# EAGLE board main (EAGLE 8.7.0)
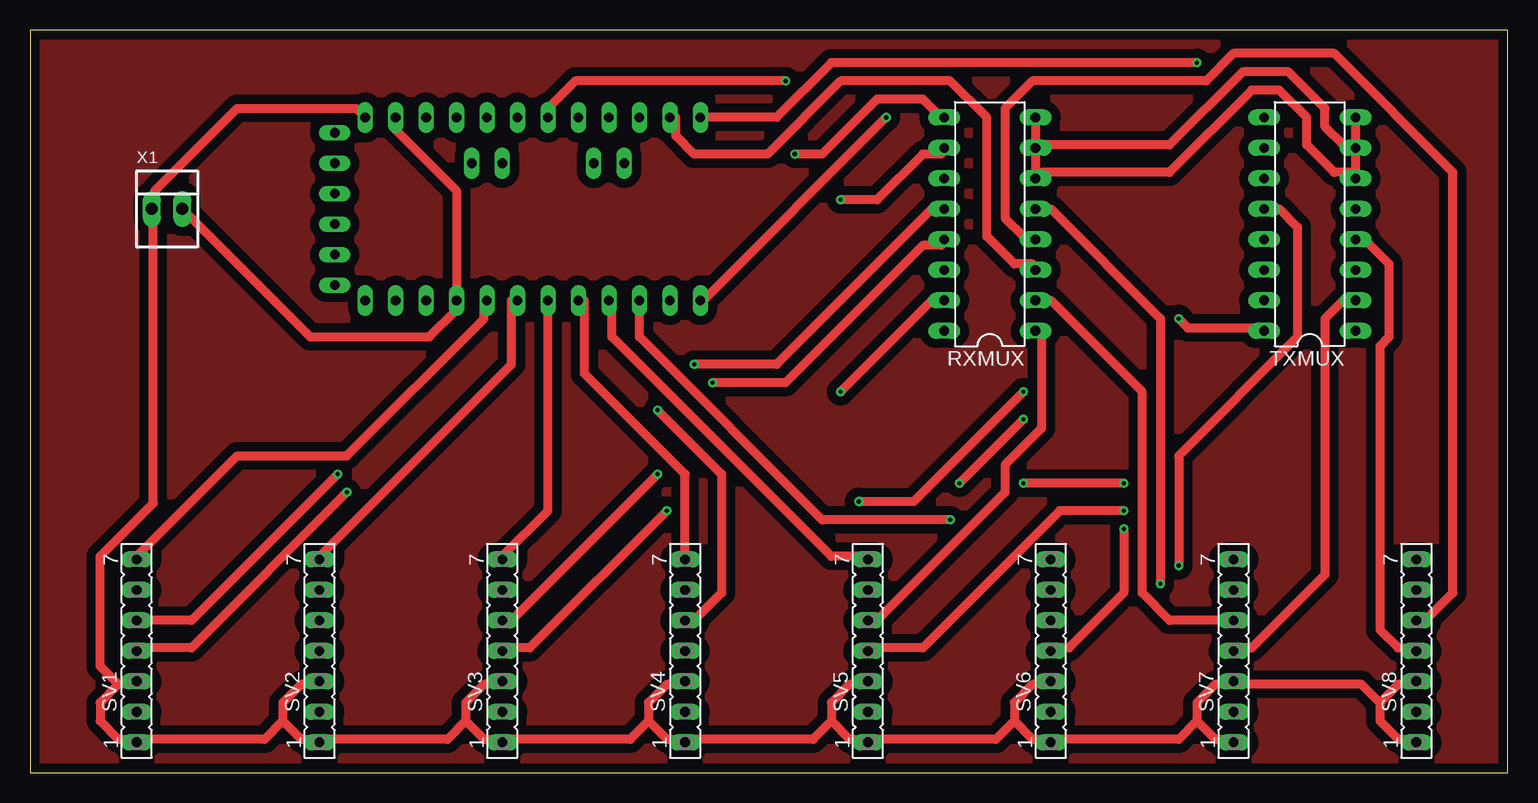
[diagram p0: board, top side]
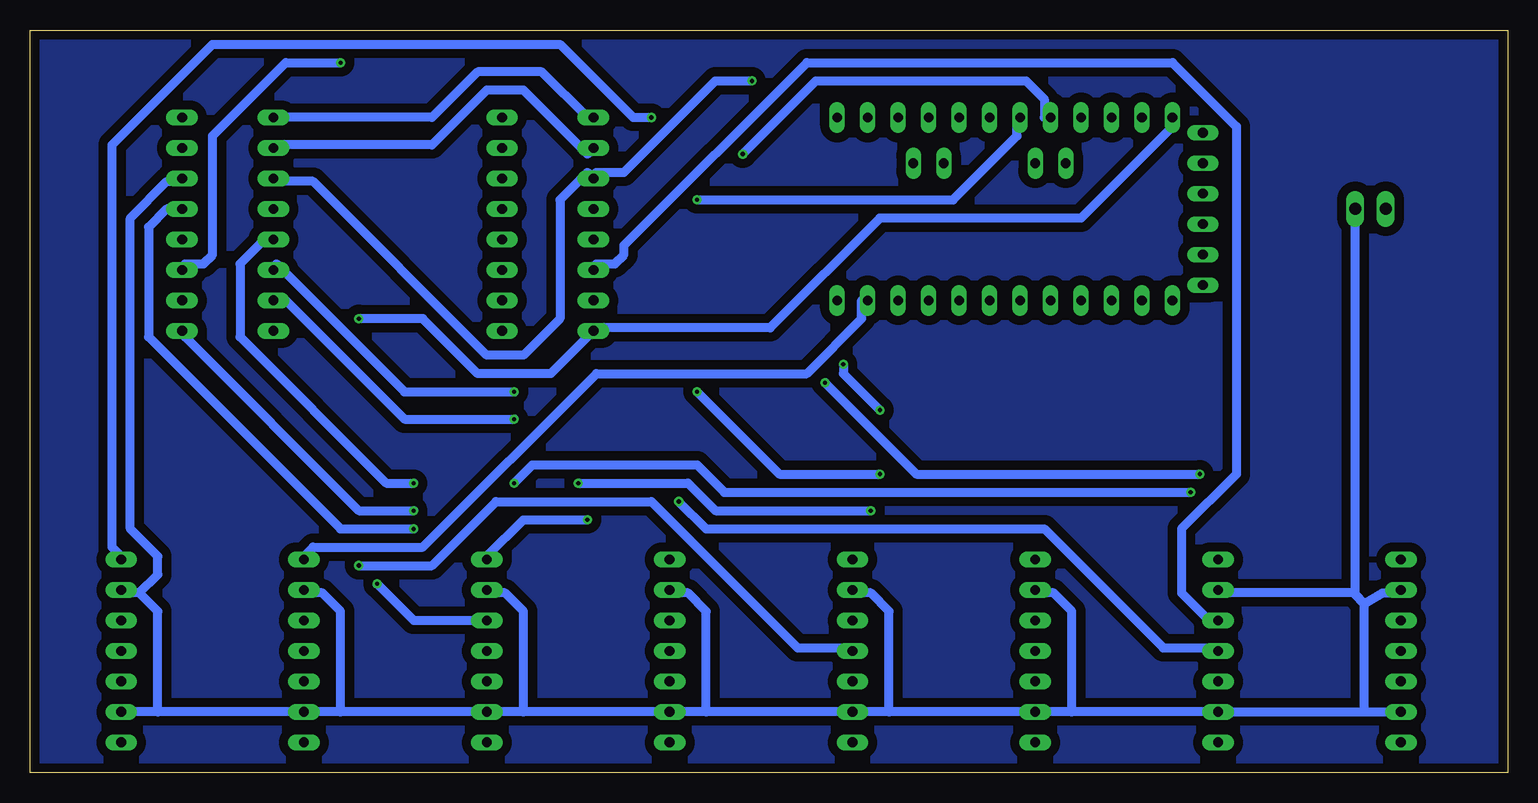
[diagram p1: board, bottom side, seen from below]

Size 123.17 x 61.9 mm. Coordinates in mm from the lower left corner, seen from the top.
Outline: 0,0 123.17,0 123.17,61.9 0,61.9 0,0
Copper layers (1*16): Top 0.035mm / dielectric 1.5mm / Bottom 0.035mm
Design rules "default *": minimum track width 30mil, minimum drill 0.35mm, track to track 30mil, track to pad 30mil, pad to pad 30mil, via to via 30mil, smd to smd 30mil, copper to edge 30mil, drill to drill 40mil, minimum pad ring 10mil, minimum via ring 8mil, stop-mask expansion 4mil, vias tented up to drill 0mil, thermal gap 10mil

## Footprints (pad centres in the part's own frame; a part is rotated, then mirrored left to right if it is on the bottom)
DIL16 = drill 0.813 long: 1 -8.89,-3.81; 2 -6.35,-3.81; 3 -3.81,-3.81; 4 -1.27,-3.81; 5 1.27,-3.81; 6 3.81,-3.81; 7 6.35,-3.81; 8 8.89,-3.81; 9 8.89,3.81; 10 6.35,3.81; 11 3.81,3.81; 12 1.27,3.81; 13 -1.27,3.81; 14 -3.81,3.81; 15 -6.35,3.81; 16 -8.89,3.81
FE07 = drill 0.813 long: 1 -7.62,0; 2 -5.08,0; 3 -2.54,0; 4 0,0; 5 2.54,0; 6 5.08,0; 7 7.62,0
PRO-MINI-2 = drill 0.8 long: A0 6.35,2.54; A1 6.35,0; A2 6.35,-2.54; A3 6.35,-5.08; A4 2.54,1.27; A5 2.54,3.81; A6 2.54,-8.89; A7 2.54,-6.35; D2 -8.89,2.54; D3 -8.89,0; D4 -8.89,-2.54; D5 -8.89,-5.08; D6 -8.89,-7.62; D7 -8.89,-10.16; D8 -8.89,-12.7; D9 -8.89,-15.24; D10 6.35,-15.24; D11 6.35,-12.7; D12 6.35,-10.16; D13 6.35,-7.62; DTR 5.08,15.24; GND 6.35,10.16; GND1 -8.89,5.08; GND2 -7.62,15.24; GND3 -5.08,15.24; RAW 6.35,12.7; RST 6.35,7.62; RST1 -8.89,7.62; RX1 -8.89,10.16; RX1-1 0,15.24; TX0 -8.89,12.7; TX0-1 2.54,15.24; VCC 6.35,5.08; VCC1 -2.54,15.24
22-23-2021 = drill 1 long: 1 -1.27,0; 2 1.27,0

## Placement (x,y rotation side)
RXMUX  4051N  [DIL16]  80.01,45.72 90 top
SV1  [FE07]  8.89,10.16 90 top
SV2  [FE07]  24.13,10.16 90 top
SV3  [FE07]  39.37,10.16 90 top
SV4  [FE07]  54.61,10.16 90 top
SV5  [FE07]  69.85,10.16 90 top
SV6  [FE07]  85.09,10.16 90 top
SV7  [FE07]  100.33,10.16 90 top
SV8  [FE07]  115.57,10.16 90 top
TXMUX  4051N  [DIL16]  106.68,45.72 90 top
U$1  PRO-MINI-2  [PRO-MINI-2]  40.64,48.26 90 top
X1  22-23-2021  [22-23-2021]  11.43,46.99 0 top

## Library data of the parts
RXMUX TXMUX = 40xx
SV1-SV8 = con-lsta; OC_FARNELL: unknown; OC_NEWARK: unknown
U$1 = Arduino-clone
X1 = con-molex; MF: MOLEX; MPN: 22-23-2021; OC_FARNELL: 1462926; OC_NEWARK: 25C3832; SPICEPREFIX: X

## Nets
ADDR0: RXMUX.11 TXMUX.11 U$1.A2
ADDR1: RXMUX.10 TXMUX.10 U$1.A1
ADDR2: RXMUX.9 TXMUX.9 U$1.A0
ENABLE0: SV1.7 U$1.D2
ENABLE1: SV2.7 U$1.D3
ENABLE2: SV3.7 U$1.D4
ENABLE3: SV4.7 U$1.D5
ENABLE4: SV5.7 U$1.D6
ENABLE5: SV6.7 U$1.D7
ENABLE6: SV7.7 U$1.D8
ENABLE7: SV8.7 U$1.D9
GND: RXMUX.6 RXMUX.8 SV1.2 SV1.6 SV2.2 SV2.6 SV3.2 SV3.6 SV4.2 SV4.6 SV5.2 SV5.6 SV6.2 SV6.6 SV7.2 SV7.6 SV8.2 SV8.6 TXMUX.6 TXMUX.8 U$1.GND U$1.GND1 X1.2
N$1: RXMUX.3 U$1.D11
N$2: TXMUX.3 U$1.D10
RX0: RXMUX.13 SV1.5
RX1: RXMUX.14 SV2.5
RX2: RXMUX.15 SV3.5
RX3: RXMUX.12 SV4.5
RX4: RXMUX.1 SV5.5
RX5: RXMUX.5 SV6.5
RX6: RXMUX.2 SV7.5
RX7: RXMUX.4 SV8.5
TX0: SV1.4 TXMUX.13
TX1: SV2.4 TXMUX.14
TX2: SV3.4 TXMUX.15
TX3: SV4.4 TXMUX.12
TX4: SV5.4 TXMUX.1
TX5: SV6.4 TXMUX.5
TX6: SV7.4 TXMUX.2
TX7: SV8.4 TXMUX.4
VCC: RXMUX.16 SV1.1 SV1.3 SV2.1 SV2.3 SV3.1 SV3.3 SV4.1 SV4.3 SV5.1 SV5.3 SV6.1 SV6.3 SV7.1 SV7.3 SV8.1 SV8.3 TXMUX.16 U$1.RAW X1.1
VEE: RXMUX.7 TXMUX.7

## Tracks (layer width: path | path; a pad name or v marks a point on that pad's centre or on a via)
ADDR0  (via drill 0.35)
  Top 0.762: U$1.A2 43.18,55.37 45.47,57.66 v62.99,57.66
  Bottom 0.762: v62.99,57.66 66.04,57.66 73.66,50.04 75.95,50.04 RXMUX.11 76.71,50.04 78.99,47.75 78.99,37.85 82.04,34.8 85.09,34.8 99.57,49.28 102.62,49.28 TXMUX.11
ADDR1  (via drill 0.35)
  Top 0.762: v67.56,47.75 70.61,47.75 74.42,51.56 75.95,51.56 RXMUX.10
  Bottom 0.762: v67.56,47.75 46.23,47.75 40.89,53.09 40.89,54.61 U$1.A1 | TXMUX.10 102.62,52.32 89.66,52.32 85.09,56.9 82.04,56.9 76.71,51.56 RXMUX.10
ADDR2  (via drill 0.35)
  Top 0.762: v63.75,51.56 66.04,51.56 70.61,56.13 74.42,56.13 75.95,54.61 RXMUX.9
  Bottom 0.762: v63.75,51.56 57.66,57.66 40.13,57.66 38.61,56.13 38.61,54.61 U$1.A0 | TXMUX.9 89.66,54.61 85.85,58.42 80.52,58.42 76.71,54.61 RXMUX.9
ENABLE0
  Top 0.762: U$1.D2 37.85,39.37 37.85,37.85 26.42,26.42 17.27,26.42 8.89,18.03 SV1.7
ENABLE1
  Top 0.762: U$1.D3 40.13,39.37 40.13,34.04 24.13,18.03 SV2.7
ENABLE2
  Top 0.762: U$1.D4 43.18,21.84 39.37,18.03 SV3.7
ENABLE3
  Top 0.762: SV4.7 54.61,24.89 46.23,33.27 46.23,39.37 U$1.D5
ENABLE4
  Top 0.762: U$1.D6 48.51,39.37 48.51,36.32 66.8,18.03 69.85,18.03 SV5.7
ENABLE5  (via drill 0.35)
  Top 0.762: U$1.D7 50.8,36.32 66.04,21.08 v76.71,21.08
  Bottom 0.762: v76.71,21.08 82.04,21.08 85.09,18.03 SV6.7
ENABLE6
  Bottom 0.762: U$1.D8 53.85,39.37 53.85,37.85 58.42,33.27 75.95,33.27 90.42,18.8 99.57,18.8 100.33,18.03 SV7.7
ENABLE7  (via drill 0.35)
  Top 0.762: v71.37,54.61 56.13,39.37 U$1.D9
  Bottom 0.762: v71.37,54.61 72.9,54.61 78.99,60.71 107.95,60.71 116.33,52.32 116.33,18.8 115.57,18.03 SV8.7
GND
  Top 0.762: U$1.GND 30.35,54.61 30.35,53.72 35.56,48.51 U$1.GND1 35.56,38.61 33.27,36.32 23.37,36.32 X1.2 | TXMUX.8 TXMUX.6 110.24,50.04 108.71,50.04 106.43,52.32 106.43,54.61 104.14,56.9 101.85,56.9 95,50.04 84.33,50.04 RXMUX.6 RXMUX.8
  Bottom 0.762: 11.94,5.08 SV2.2 36.32,5.08 | 11.94,5.08 SV1.2 | 36.32,5.08 SV3.2 51.56,5.08 | 51.56,5.08 SV4.2 66.8,5.08 | 66.8,5.08 SV5.2 82.04,5.08 | 82.04,5.08 SV6.2 97.28,5.08 | 11.94,14.1 10.41,14.99 8.89,14.99 SV1.6 | 11.94,5.08 11.94,14.1 | 11.94,14.1 12.7,14.86 | 12.7,14.86 12.83,14.99 24.13,14.99 SV2.6 | 36.32,5.08 36.32,13.46 37.85,14.99 39.37,14.99 SV3.6 | 51.56,5.08 51.56,13.46 53.09,14.99 54.61,14.99 SV4.6 | 66.8,5.08 66.8,13.46 68.33,14.99 69.85,14.99 SV5.6 | 82.04,5.08 82.04,13.46 83.57,14.99 85.09,14.99 SV6.6 | 97.28,5.08 SV7.2 112.52,5.08 | 97.28,5.08 97.28,13.46 98.81,14.99 100.33,14.99 SV7.6 | 112.52,5.08 SV8.2 | 114.05,14.99 115.57,14.99 SV8.6 | 114.05,14.99 112.52,13.46 112.52,5.08 | 12.7,14.86 X1.2 | 114.05,14.99 112.52,16.51 112.52,18.03 114.81,20.32 114.81,46.23 111.76,49.28 111,49.28 TXMUX.6
N$1
  Top 0.762: U$1.D11 53.85,54.61 53.85,53.09 55.37,51.56 61.47,51.56 67.56,57.66 76.71,57.66 79.76,54.61 79.76,44.7 82.04,42.42 83.57,42.42 RXMUX.3
N$2  (via drill 0.35)
  Top 0.762: U$1.D10 62.23,54.61 66.8,59.18 v97.28,59.18
  Bottom 0.762: v97.28,59.18 101.85,59.18 107.95,53.09 107.95,43.18 108.71,42.42 110.24,42.42 TXMUX.3
N$3
  pour Top: 0.63,61.6 123.19,61.6 123.19,0 0.63,0 0,0 0,61.6
  pour Bottom: 0.63,61.6 123.19,61.6 123.19,0 0.63,0 0,0 0,61.6
RX0  (via drill 0.35)
  Top 0.762: SV1.5 13.46,12.7 v25.65,24.89 | v56.9,32.51 62.99,32.51 74.42,43.94 75.95,43.94 RXMUX.13
  Bottom 0.762: v25.65,24.89 49.28,24.89 v56.9,32.51
RX1
  Bottom 0.762: SV2.5 24.89,12.7 27.18,14.99 27.18,20.32 22.61,24.89 22.61,53.85 27.94,59.18 58.42,59.18 73.66,43.94 73.66,43.18 74.42,42.42 75.95,42.42 RXMUX.14
RX2  (via drill 0.35)
  Top 0.762: SV3.5 40.13,12.7 v52.32,24.89 | v67.56,31.75 75.18,39.37 RXMUX.15
  Bottom 0.762: v52.32,24.89 60.71,24.89 v67.56,31.75
RX3  (via drill 0.35)
  Top 0.762: SV4.5 55.37,12.7 57.66,14.99 57.66,24.89 v52.32,30.23 | v55.37,34.04 62.23,34.04 75.18,46.99 RXMUX.12
  Bottom 0.762: v52.32,30.23 55.37,33.27 v55.37,34.04
RX4
  Top 0.762: SV5.5 70.61,12.7 81.28,23.37 81.28,25.65 84.33,28.7 84.33,36.32 RXMUX.1
RX5  (via drill 0.35)
  Top 0.762: v94.23,15.75 94.23,37.85 85.09,46.99 RXMUX.5
  Bottom 0.762: SV6.5 91.19,12.7 v94.23,15.75
RX6
  Top 0.762: RXMUX.2 85.09,39.37 92.71,31.75 92.71,14.99 95,12.7 SV7.5
RX7
  Top 0.762: SV8.5 116.33,12.7 118.62,14.99 118.62,50.04 108.71,59.94 100.33,59.94 98.04,57.66 83.57,57.66 81.28,55.37 81.28,46.23 82.8,44.7 83.57,44.7 RXMUX.4
TX0  (via drill 0.35)
  Top 0.762: v26.42,23.37 13.46,10.41 8.89,10.41 SV1.4 | v91.19,24.13 v82.8,24.13
  Bottom 0.762: v26.42,23.37 65.28,23.37 67.56,25.65 81.28,25.65 v82.8,24.13 | v91.19,24.13 93.47,24.13 105.66,36.32 105.66,42.42 103.38,44.7 TXMUX.13
TX1  (via drill 0.35)
  Top 0.762: v69.09,22.61 73.66,22.61 v82.8,31.75
  Bottom 0.762: v69.09,22.61 66.8,20.32 38.61,20.32 28.7,10.41 24.13,10.41 SV2.4 | v82.8,31.75 91.95,31.75 102.62,42.42 TXMUX.14
TX2  (via drill 0.35)
  Top 0.762: v53.09,21.84 41.66,10.41 39.37,10.41 SV3.4 | v82.8,29.46 v77.47,24.13
  Bottom 0.762: v53.09,21.84 66.04,21.84 68.33,24.13 v77.47,24.13 | v82.8,29.46 91.95,29.46 101.85,39.37 TXMUX.15
TX3  (via drill 0.35)
  Top 0.762: v95.76,17.27 95.76,26.42 105.66,36.32 105.66,45.47 104.14,46.99 TXMUX.12
  Bottom 0.762: v95.76,17.27 89.66,17.27 84.33,22.61 71.37,22.61 59.18,10.41 54.61,10.41 SV4.4
TX4  (via drill 0.35)
  Top 0.762: v91.19,21.84 85.85,21.84 74.42,10.41 69.85,10.41 SV5.4
  Bottom 0.762: v91.19,21.84 95.76,21.84 110.24,36.32 TXMUX.1
TX5  (via drill 0.35)
  Top 0.762: v91.19,20.32 91.19,14.99 86.61,10.41 85.09,10.41 SV6.4
  Bottom 0.762: v91.19,20.32 97.28,20.32 113.28,36.32 113.28,45.47 111.76,46.99 TXMUX.5
TX6
  Top 0.762: TXMUX.2 109.47,39.37 107.95,37.85 107.95,16.51 101.85,10.41 100.33,10.41 SV7.4
TX7
  Top 0.762: SV8.4 115.57,10.41 114.05,10.41 112.52,11.94 112.52,35.56 113.28,36.32 113.28,42.42 111,44.7 TXMUX.4
VCC  (via drill 0.35)
  Top 0.762: U$1.RAW 27.18,55.37 17.27,55.37 10.41,48.51 10.41,46.99 10.29,46.99 | v95.76,37.85 96.52,37.08 102.62,37.08 TXMUX.16 | 8.89,2.79 7.37,2.79 5.84,4.32 5.84,5.84 7.37,7.37 | 7.37,7.37 8.89,7.37 SV1.3 | 24.13,2.79 22.61,2.79 21.08,4.32 | 21.08,4.32 21.08,5.84 22.61,7.37 24.13,7.37 SV2.3 | 8.89,2.79 19.56,2.79 21.08,4.32 | 8.89,2.79 SV1.1 | 39.37,2.79 37.85,2.79 36.32,4.32 | 36.32,4.32 36.32,5.84 37.85,7.37 39.37,7.37 SV3.3 | 54.61,2.79 53.09,2.79 51.56,4.32 | 51.56,4.32 51.56,5.84 53.09,7.37 54.61,7.37 SV4.3 | 39.37,2.79 50.04,2.79 51.56,4.32 | 39.37,2.79 SV3.1 | 24.13,2.79 34.8,2.79 36.32,4.32 | 24.13,2.79 SV2.1 | 69.85,2.79 68.33,2.79 66.8,4.32 | 66.8,4.32 66.8,5.84 68.33,7.37 69.85,7.37 SV5.3 | 85.09,2.79 83.57,2.79 82.04,4.32 | 82.04,4.32 82.04,5.84 83.57,7.37 85.09,7.37 SV6.3 | 69.85,2.79 80.52,2.79 82.04,4.32 | 69.85,2.79 SV5.1 | 97.28,4.32 98.81,2.79 100.33,2.79 SV7.1 | 97.28,4.32 97.28,5.84 98.81,7.37 100.33,7.37 | 112.52,5.84 112.52,4.32 114.05,2.79 115.57,2.79 SV8.1 | 112.52,5.84 114.05,7.37 115.57,7.37 SV8.3 | 100.33,7.37 111,7.37 112.52,5.84 | 100.33,7.37 SV7.3 | 85.09,2.79 95.76,2.79 97.28,4.32 | 85.09,2.79 SV6.1 | 54.61,2.79 65.28,2.79 66.8,4.32 | 54.61,2.79 SV4.1 | 10.29,46.99 10.29,22.48 5.84,18.03 5.84,8.89 7.37,7.37 | 10.29,46.99 X1.1
  Bottom 0.762: U$1.RAW 27.94,53.85 35.56,46.23 52.32,46.23 61.47,37.08 75.95,37.08 RXMUX.16 79.76,33.27 85.85,33.27 90.42,37.85 v95.76,37.85
VEE
  Top 0.762: RXMUX.7 84.33,52.32 95,52.32 101.09,58.42 104.9,58.42 107.95,55.37 107.95,53.85 109.47,52.32 110.24,52.32 TXMUX.7